# Altium PCB heart.PcbDoc (part 2 of 8)
Units mil, origin at the board's own origin, x right, y up, seen from the top; angles counter-clockwise.
Board outline 5000 x 6000 mil, 2 copper layers (Top Layer, Bottom Layer); 76 components, 43 nets, 328 pads, 50 vias.
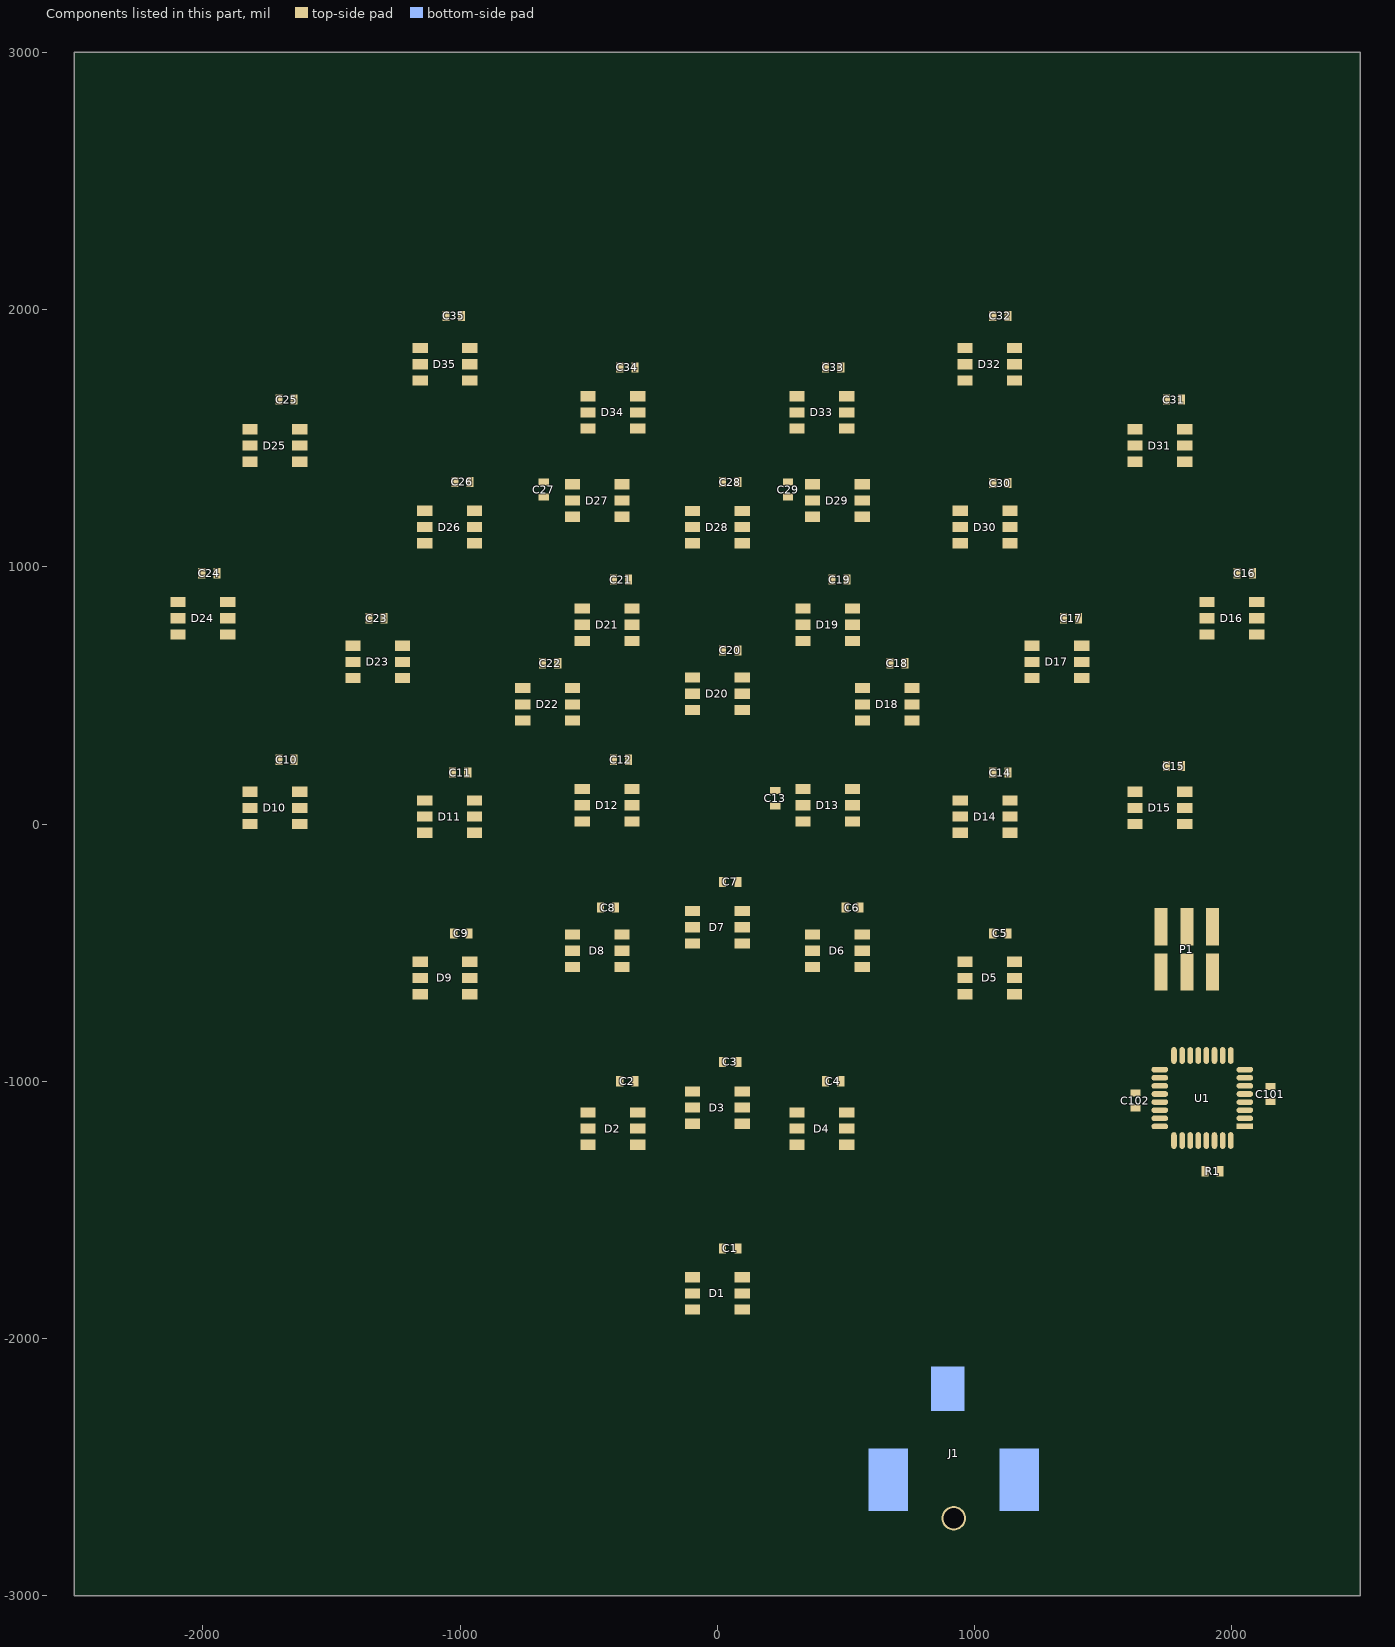
[diagram p2: the components of this part, seen from the top]

## Via types
v1: diameter 48, hole 20, Top Layer to Bottom Layer, 46 vias
v2: diameter 165, hole 150, Top Layer to Bottom Layer, 4 vias

## Nets (pads, with @x,y where several pads share a name; then routed paths per layer and width w, separated by ;. In a path a pad name is that pad's centre, name@x,y a point inside that pad or via, vN(x,y) a via of type N, cw(c..) or ccw(c..) an arc to the next point about the centre after c; other vN are vias at no path point) (continued)
copper on no net: (continued)
  Bottom Layer w2.65: -2381.33,-2287.69 -2150.35,-2287.69 ; -2381.33,-2285.04 -2153,-2285.04 ; -2381.33,-2282.38 -2158.31,-2282.38 ; -2381.33,-2279.73 -2163.62,-2279.73 ; -2381.33,-2277.07 -2166.28,-2277.07 ; -2381.33,-2274.42 -2163.62,-2274.42 ; -2381.33,-2271.76 -2145.04,-2271.76 ; -2381.33,-2269.11 -2293.72,-2269.11 ; -2381.33,-2266.45 -2296.37,-2266.45 ; -2381.33,-2263.8 -2301.68,-2263.8 ; -2381.33,-2261.14 -2301.68,-2261.14 ; -2381.33,-2258.49 -2304.34,-2258.49 ; -2381.33,-2255.83 -2306.99,-2255.83 ; -2381.33,-2253.18 -2306.99,-2253.18 ; -2381.33,-2250.52 -2306.99,-2250.52 ; -2381.33,-2247.87 -2309.65,-2247.87 ; -2381.33,-2245.21 -2309.65,-2245.21 ; -2381.33,-2242.56 -2309.65,-2242.56 ; -2381.33,-2239.9 -2309.65,-2239.9 ; -2381.33,-2237.25 -2312.3,-2237.25 ; -2381.33,-2234.59 -2314.96,-2234.59 ; -2381.33,-2231.94 -2317.61,-2231.94 ; -2381.33,-2229.28 -2322.92,-2229.28 ; -2381.33,-2226.63 -2325.58,-2226.63 ; -2381.33,-2223.97 -2325.58,-2223.97 ; -2381.33,-2221.32 -2328.23,-2221.32 ; -2381.33,-2218.66 -2330.89,-2218.66 ; -2381.33,-2216.01 -2330.89,-2216.01 ; -2381.33,-2213.35 -2333.54,-2213.35 ; -2381.33,-2210.7 -2333.54,-2210.7 ; -2381.33,-2208.04 -2336.2,-2208.04 ; -2381.33,-2205.39 -2336.2,-2205.39 ; -2381.33,-2202.73 -2336.2,-2202.73 ; -2381.33,-2200.08 -2338.85,-2200.08 ; -2381.33,-2197.42 -2338.85,-2197.42 ; -2381.33,-2194.77 -2338.85,-2194.77 ; -2381.33,-2192.11 -2338.85,-2192.11 ; -2381.33,-2189.46 -2338.85,-2189.46 ; -2381.33,-2186.8 -2338.85,-2186.8 ; -2381.33,-2184.15 -2338.85,-2184.15 ; -2381.33,-2181.49 -2338.85,-2181.49 ; -2381.33,-2178.84 -2338.85,-2178.84 ; -2381.33,-2176.18 -2338.85,-2176.18 ; -2381.33,-2173.53 -2336.2,-2173.53 ; -2381.33,-2170.87 -2336.2,-2170.87 ; -2381.33,-2168.22 -2333.54,-2168.22 ; -2381.33,-2165.56 -2333.54,-2165.56 ; -2381.33,-2162.91 -2333.54,-2162.91 ; -2381.33,-2160.25 -2330.89,-2160.25 ; -2381.33,-2157.6 -2328.23,-2157.6 ; -2381.33,-2154.94 -2325.58,-2154.94 ; -2381.33,-2152.28 -2325.58,-2152.28 ; -2381.33,-2149.63 -2322.92,-2149.63 ; -2381.33,-2146.97 -2317.61,-2146.97 ; -2381.33,-2144.32 -2314.96,-2144.32 ; -2381.33,-2141.66 -2306.99,-2141.66 ; -2381.33,-2139.01 -2299.03,-2139.01 ; -2381.33,-2136.35 -2293.72,-2136.35 ; -2381.33,-2133.7 -2293.72,-2133.7 ; -2381.33,-2131.04 -2293.72,-2131.04 ; -2381.33,-2128.39 -2293.72,-2128.39 ; -2381.33,-2125.73 -2349.47,-2125.73 ; -2381.33,-2123.08 -2354.78,-2123.08 ; -2381.33,-2120.42 -2360.09,-2120.42 ; -2381.33,-2117.77 -2365.4,-2117.77 ; -2381.33,-2115.11 -2368.06,-2115.11 ; -2381.33,-2112.46 -2368.06,-2112.46 ; -2381.33,-2109.8 -2370.71,-2109.8 ; -2381.33,-2107.15 -2373.37,-2107.15 ; -2381.33,-2104.49 -2373.37,-2104.49 ; -2381.33,-2101.84 -2373.37,-2101.84 ; -2381.33,-2099.18 -2373.37,-2099.18 ; -2381.33,-2096.53 -2373.37,-2096.53 ; -2381.33,-2093.87 -2373.37,-2093.87 ; -2381.33,-2091.22 -2373.37,-2091.22 ; -2381.33,-2088.56 -2373.37,-2088.56 ; -2381.33,-2085.91 -2373.37,-2085.91 ; -2381.33,-2083.25 -2370.71,-2083.25 ; -2381.33,-2080.6 -2370.71,-2080.6 ; -2381.33,-2077.94 -2368.06,-2077.94 ; -2381.33,-2075.29 -2370.71,-2075.29 ; -2381.33,-2072.63 -2370.71,-2072.63 ; -2381.33,-2069.98 -2373.37,-2069.98 ; -2381.33,-2067.32 -2373.37,-2067.32 ; -2381.33,-2064.67 -2376.02,-2064.67 ; -2381.33,-2062.01 -2376.02,-2062.01 ; -2381.33,-2059.36 -2378.68,-2059.36 ; -2381.33,-2056.7 -2378.68,-2056.7 ; -2381.33,-2054.05 -2378.68,-2054.05 ; -2381.33,-2051.39 -2378.68,-2051.39 ; -2381.33,-2024.84 -2378.68,-2024.84 ; -2381.33,-2022.19 -2378.68,-2022.19 ; -2381.33,-2019.53 -2378.68,-2019.53 ; -2381.33,-2016.88 -2378.68,-2016.88 ; -2381.33,-2014.22 -2376.02,-2014.22 ; -2381.33,-2011.57 -2376.02,-2011.57 ; -2381.33,-2008.91 -2376.02,-2008.91 ; -2381.33,-2006.26 -2373.37,-2006.26 ; -2381.33,-2003.6 -2373.37,-2003.6 ; -2381.33,-2000.95 -2370.71,-2000.95 ; -2381.33,-1998.29 -2368.06,-1998.29 ; -2381.33,-1995.64 -2365.4,-1995.64 ; -2381.33,-1992.98 -2362.75,-1992.98 ; -2381.33,-1990.33 -2360.09,-1990.33 ; -2381.33,-1987.67 -2357.44,-1987.67 ; -2381.33,-1985.02 -2352.13,-1985.02 ; -2381.33,-1982.36 -2346.82,-1982.36 ; -2381.33,-1979.71 -2336.2,-1979.71 ; -2381.33,-1977.05 -2293.72,-1977.05 ; -2381.33,-1974.4 -2293.72,-1974.4 ; -2381.33,-1971.74 -2293.72,-1971.74 ; -2381.33,-1969.09 -2293.72,-1969.09 ; -2381.33,-1966.43 -2293.72,-1966.43 ; -2381.33,-1963.78 -2293.72,-1963.78 ; -2381.33,-1961.12 -2293.72,-1961.12 ; -2381.33,-1958.47 -2293.72,-1958.47 ; -2381.33,-1955.81 -2296.37,-1955.81 ; -2381.33,-1953.16 -2301.68,-1953.16 ; -2381.33,-1950.5 -2301.68,-1950.5 ; -2381.33,-1947.85 -2304.34,-1947.85 ; -2381.33,-1945.19 -2304.34,-1945.19 ; -2381.33,-1942.54 -2304.34,-1942.54 ; -2381.33,-1939.88 -2304.34,-1939.88 ; -2381.33,-1937.23 -2304.34,-1937.23 ; -2381.33,-1934.57 -2304.34,-1934.57 ; -2381.33,-1931.92 -2304.34,-1931.92 ; -2381.33,-1929.26 -2304.34,-1929.26 ; -2381.33,-1926.61 -2304.34,-1926.61 ; -2381.33,-1923.95 -2304.34,-1923.95 ; -2381.33,-1921.3 -2304.34,-1921.3 ; -2381.33,-1918.64 -2304.34,-1918.64 ; -2381.33,-1915.99 -2304.34,-1915.99 ; -2381.33,-1913.33 -2293.72,-1913.33 ; -2381.33,-1910.68 -2293.72,-1910.68 ; -2381.33,-1908.02 -2293.72,-1908.02 ; -2381.33,-1905.37 -2293.72,-1905.37 ; -2381.33,-1902.71 -2293.72,-1902.71 ; -2381.33,-1900.06 -2293.72,-1900.06 ; -2381.33,-1897.4 -2293.72,-1897.4 ; -2381.33,-1894.75 -2293.72,-1894.75 ; -2381.33,-1892.09 -2293.72,-1892.09 ; -2381.33,-1889.44 -2293.72,-1889.44 ; -2381.33,-1886.78 -2293.72,-1886.78 ; -2381.33,-1884.13 -2293.72,-1884.13 ; -2381.33,-1881.47 -2293.72,-1881.47 ; -2381.33,-1878.82 -2293.72,-1878.82 ; -2381.33,-1876.16 -2293.72,-1876.16 ; -2381.33,-1873.51 -2293.72,-1873.51 ; -2381.33,-1870.85 -2293.72,-1870.85 ; -2381.33,-1868.2 -2293.72,-1868.2 ; -2381.33,-1865.54 -2293.72,-1865.54 ; -2381.33,-1862.89 -2293.72,-1862.89 ; -2381.33,-1860.23 -2293.72,-1860.23 ; -2381.33,-1857.58 -2293.72,-1857.58 ; -2381.33,-1854.92 -2293.72,-1854.92 ; -2381.33,-1852.27 -2293.72,-1852.27 ; -2381.33,-1849.61 -2293.72,-1849.61 ; -2381.33,-1846.96 -2293.72,-1846.96 ; -2381.33,-1844.3 -2293.72,-1844.3 ; -2381.33,-1841.65 -2293.72,-1841.65 ; -2381.33,-1838.99 -2293.72,-1838.99 ; -2381.33,-1836.34 -2293.72,-1836.34 ; -2381.33,-1833.68 -2293.72,-1833.68 ; -2381.33,-1831.03 -2293.72,-1831.03 ; -2381.33,-1828.37 -2293.72,-1828.37 ; -2381.33,-1825.72 -2293.72,-1825.72 ; -2381.33,-1823.06 -2293.72,-1823.06 ; -2381.33,-1820.41 -2293.72,-1820.41 ; -2381.33,-1817.75 -2293.72,-1817.75 ; -2381.33,-1815.1 -2293.72,-1815.1 ; -2381.33,-1812.44 -2293.72,-1812.44 ; -2381.33,-1809.79 -2293.72,-1809.79 ; -2381.33,-1807.13 -2293.72,-1807.13 ; -2381.33,-1804.48 -2293.72,-1804.48 ; -2381.33,-1801.82 -2293.72,-1801.82 ; -2381.33,-1799.17 -2293.72,-1799.17 ; -2381.33,-1796.51 -2293.72,-1796.51 ; -2381.33,-1793.86 -2293.72,-1793.86 ; -2381.33,-1791.2 -2293.72,-1791.2 ; -2381.33,-1788.55 -2293.72,-1788.55 ; -2381.33,-1785.89 -2293.72,-1785.89 ; -2381.33,-1783.24 -2293.72,-1783.24 ; -2381.33,-1780.58 -2293.72,-1780.58 ; -2381.33,-1777.93 -2293.72,-1777.93 ; -2381.33,-1775.27 -2293.72,-1775.27 ; -2381.33,-1772.62 -2293.72,-1772.62 ; -2381.33,-1769.96 -2293.72,-1769.96 ; -2381.33,-1767.31 -2293.72,-1767.31 ; -2381.33,-1764.65 -2293.72,-1764.65 ; -2381.33,-1762 -2293.72,-1762 ; -2381.33,-1759.34 -2293.72,-1759.34 ; -2381.33,-1756.69 -2293.72,-1756.69 ; -2381.33,-1754.03 -2304.34,-1754.03 ; -2381.33,-1751.38 -2304.34,-1751.38 ; -2381.33,-1748.72 -2304.34,-1748.72 ; -2381.33,-1746.07 -2304.34,-1746.07 ; -2381.33,-1743.41 -2304.34,-1743.41 ; -2381.33,-1740.76 -2304.34,-1740.76 ; -2381.33,-1738.1 -2304.34,-1738.1 ; -2381.33,-1735.45 -2304.34,-1735.45 ; -2381.33,-1732.79 -2304.34,-1732.79 ; -2381.33,-1730.14 -2304.34,-1730.14 ; -2381.33,-1727.48 -2304.34,-1727.48 ; -2381.33,-1724.83 -2304.34,-1724.83 ; -2381.33,-1722.17 -2304.34,-1722.17 ; -2381.33,-1719.52 -2301.68,-1719.52 ; -2381.33,-1716.86 -2301.68,-1716.86 ; -2381.33,-1714.21 -2296.37,-1714.21 ; -2381.33,-1711.55 -2293.72,-1711.55 ; -2381.33,-1708.9 -2293.72,-1708.9 ; -2381.33,-1706.24 -2293.72,-1706.24 ; -2381.33,-1703.59 -2293.72,-1703.59 ; -2381.33,-1700.93 -2293.72,-1700.93 ; -2381.33,-1698.28 -2293.72,-1698.28 ; -2381.33,-1695.62 -2293.72,-1695.62 ; -2381.33,-1692.97 -2293.72,-1692.97 ; -2381.33,-1690.31 -2338.85,-1690.31 ; -2381.33,-1687.66 -2346.82,-1687.66 ; -2381.33,-1685 -2352.13,-1685 ; -2381.33,-1682.35 -2357.44,-1682.35 ; -2381.33,-1679.69 -2360.09,-1679.69 ; -2381.33,-1677.04 -2365.4,-1677.04 ; -2381.33,-1674.38 -2365.4,-1674.38 ; -2381.33,-1671.73 -2368.06,-1671.73 ; -2381.33,-1669.07 -2370.71,-1669.07 ; -2381.33,-1666.42 -2373.37,-1666.42 ; -2381.33,-1663.76 -2373.37,-1663.76 ; -2381.33,-1661.11 -2376.02,-1661.11 ; -2381.33,-1658.45 -2376.02,-1658.45 ; -2381.33,-1655.8 -2378.68,-1655.8 ; -2381.33,-1653.14 -2378.68,-1653.14 ; -2381.33,-1650.49 -2378.68,-1650.49 ; -2381.33,-1647.83 -2378.68,-1647.83 ; -2381.33,-1645.18 -2378.68,-1645.18 ; -2381.33,-1618.62 -2378.68,-1618.62 ; -2381.33,-1615.97 -2378.68,-1615.97 ; -2381.33,-1613.31 -2378.68,-1613.31 ; -2381.33,-1610.66 -2378.68,-1610.66 ; -2381.33,-1608 -2376.02,-1608 ; -2381.33,-1605.35 -2376.02,-1605.35 ; -2381.33,-1602.69 -2373.37,-1602.69 ; -2381.33,-1600.04 -2373.37,-1600.04 ; -2381.33,-1597.38 -2370.71,-1597.38 ; -2381.33,-1594.73 -2370.71,-1594.73 ; -2381.33,-1592.07 -2368.06,-1592.07 ; -2381.33,-1589.42 -2370.71,-1589.42 ; -2381.33,-1586.76 -2370.71,-1586.76 ; -2381.33,-1584.11 -2373.37,-1584.11 ; -2381.33,-1581.45 -2373.37,-1581.45 ; -2381.33,-1578.8 -2373.37,-1578.8 ; -2381.33,-1576.14 -2373.37,-1576.14 ; -2381.33,-1573.49 -2373.37,-1573.49 ; -2381.33,-1570.83 -2373.37,-1570.83 ; -2381.33,-1568.18 -2373.37,-1568.18 ; -2381.33,-1565.52 -2373.37,-1565.52 ; -2381.33,-1562.87 -2370.71,-1562.87 ; -2381.33,-1560.21 -2370.71,-1560.21 ; -2381.33,-1557.56 -2368.06,-1557.56 ; -2381.33,-1554.9 -2368.06,-1554.9 ; -2381.33,-1552.25 -2365.4,-1552.25 ; -2381.33,-1549.59 -2360.09,-1549.59 ; -2381.33,-1546.94 -2354.78,-1546.94 ; -2381.33,-1544.28 -2346.82,-1544.28 ; -2381.33,-1541.63 -2293.72,-1541.63 ; -2381.33,-1538.97 -2293.72,-1538.97 ; -2381.33,-1536.32 -2293.72,-1536.32 ; -2381.33,-1533.66 -2293.72,-1533.66 ; -2381.33,-1531.01 -2299.03,-1531.01 ; -2381.33,-1528.35 -2309.65,-1528.35 ; -2381.33,-1525.7 -2314.96,-1525.7 ; -2381.33,-1523.04 -2317.61,-1523.04 ; -2381.33,-1520.39 -2322.92,-1520.39 ; -2381.33,-1517.73 -2325.58,-1517.73 ; -2381.33,-1515.08 -2325.58,-1515.08 ; -2381.33,-1512.42 -2328.23,-1512.42 ; -2381.33,-1509.77 -2330.89,-1509.77 ; -2381.33,-1507.11 -2333.54,-1507.11 ; -2381.33,-1504.46 -2333.54,-1504.46 ; -2381.33,-1501.8 -2336.2,-1501.8 ; -2381.33,-1499.15 -2336.2,-1499.15 ; -2381.33,-1496.49 -2336.2,-1496.49 ; -2381.33,-1493.84 -2338.85,-1493.84 ; -2381.33,-1491.18 -2338.85,-1491.18 ; -2381.33,-1488.53 -2338.85,-1488.53 ; -2381.33,-1485.87 -2338.85,-1485.87 ; -2381.33,-1483.22 -2338.85,-1483.22 ; -2381.33,-1480.56 -2338.85,-1480.56 ; -2381.33,-1477.91 -2338.85,-1477.91 ; -2381.33,-1475.25 -2338.85,-1475.25 ; -2381.33,-1472.6 -2338.85,-1472.6 ; -2381.33,-1469.94 -2338.85,-1469.94 ; -2381.33,-1467.29 -2336.2,-1467.29 ; -2381.33,-1464.63 -2336.2,-1464.63 ; -2381.33,-1461.98 -2336.2,-1461.98 ; -2381.33,-1459.32 -2333.54,-1459.32 ; -2381.33,-1456.67 -2333.54,-1456.67 ; -2381.33,-1454.01 -2330.89,-1454.01 ; -2381.33,-1451.36 -2330.89,-1451.36 ; -2381.33,-1448.7 -2328.23,-1448.7 ; -2381.33,-1446.05 -2325.58,-1446.05 ; -2381.33,-1443.39 -2322.92,-1443.39 ; -2381.33,-1440.74 -2320.27,-1440.74 ; -2381.33,-1438.08 -2317.61,-1438.08 ; -2381.33,-1435.43 -2314.96,-1435.43 ; -2381.33,-1432.77 -2309.65,-1432.77 ; -2381.33,-1430.12 -2309.65,-1430.12 ; -2381.33,-1427.46 -2309.65,-1427.46 ; -2381.33,-1424.81 -2309.65,-1424.81 ; -2381.33,-1422.15 -2309.65,-1422.15 ; -2381.33,-1419.5 -2306.99,-1419.5 ; -2381.33,-1416.84 -2306.99,-1416.84 ; -2381.33,-1414.19 -2306.99,-1414.19 ; -2381.33,-1411.53 -2304.34,-1411.53 ; -2381.33,-1408.88 -2301.68,-1408.88 ; -2381.33,-1406.22 -2301.68,-1406.22 ; -2381.33,-1403.57 -2296.37,-1403.57 ; -2381.33,-1400.91 -2293.72,-1400.91 ; -2381.33,-1398.26 -2293.72,-1398.26 ; -2381.33,-1395.6 -2293.72,-1395.6 ; -2381.33,-1392.95 -2293.72,-1392.95 ; -2381.33,-1390.29 -2293.72,-1390.29 ; -2381.33,-1387.64 -2293.72,-1387.64 ; -2381.33,-1384.98 -2293.72,-1384.98 ; -2381.33,-1382.33 -2293.72,-1382.33 ; -2381.33,-1379.67 -2293.72,-1379.67 ; -2381.33,-1377.02 -2293.72,-1377.02 ; -2381.33,-1374.36 -2293.72,-1374.36 ; -2381.33,-1371.71 -2293.72,-1371.71 ; -2381.33,-1369.05 -2293.72,-1369.05 ; -2381.33,-1366.4 -2293.72,-1366.4 ; -2381.33,-1363.74 -2293.72,-1363.74 ; -2381.33,-1361.09 -2293.72,-1361.09 ; -2381.33,-1358.43 -2293.72,-1358.43 ; -2381.33,-1355.78 -2293.72,-1355.78 ; -2381.33,-1353.12 -2293.72,-1353.12 ; -2381.33,-1350.47 -2293.72,-1350.47 ; -2381.33,-1347.81 -2293.72,-1347.81 ; -2381.33,-1345.16 -2293.72,-1345.16 ; -2381.33,-1342.5 -2293.72,-1342.5 ; -2381.33,-1339.85 -2293.72,-1339.85 ; -2381.33,-1337.19 -2293.72,-1337.19 ; -2381.33,-1334.54 -2293.72,-1334.54 ; -2381.33,-1331.88 -2293.72,-1331.88 ; -2381.33,-1329.23 -2293.72,-1329.23 ; -2381.33,-1326.57 -2291.06,-1326.57 ; -2381.33,-1323.92 -2291.06,-1323.92 ; -2381.33,-1321.26 -2291.06,-1321.26 ; -2381.33,-1318.61 -2291.06,-1318.61 ; -2381.33,-1315.95 -2293.72,-1315.95 ; -2381.33,-1313.3 -2293.72,-1313.3 ; -2381.33,-1310.64 -2296.37,-1310.64 ; -2381.33,-1307.99 -2296.37,-1307.99 ; -2381.33,-1305.33 -2299.03,-1305.33 ; -2381.33,-1302.68 -2299.03,-1302.68 ; -2381.33,-1300.02 -2299.03,-1300.02 ; -2381.33,-1297.37 -2299.03,-1297.37 ; -2381.33,-1294.71 -2301.68,-1294.71 ; -2381.33,-1292.06 -2301.68,-1292.06 ; -2381.33,-1289.4 -2301.68,-1289.4 ; -2381.33,-1286.75 -2301.68,-1286.75 ; -2381.33,-1284.09 -2301.68,-1284.09 ; -2381.33,-1281.44 -2301.68,-1281.44 ; -2381.33,-1278.78 -2301.68,-1278.78 ; -2381.33,-1276.13 -2301.68,-1276.13 ; -2381.33,-1273.47 -2301.68,-1273.47 ; -2381.33,-1270.82 -2301.68,-1270.82 ; -2381.33,-1268.16 -2301.68,-1268.16 ; -2381.33,-1265.51 -2301.68,-1265.51 ; -2381.33,-1262.85 -2299.03,-1262.85 ; -2381.33,-1260.2 -2299.03,-1260.2 ; -2381.33,-1257.54 -2299.03,-1257.54 ; -2381.33,-1254.89 -2299.03,-1254.89 ; -2381.33,-1252.23 -2296.37,-1252.23 ; -2381.33,-1249.58 -2296.37,-1249.58 ; -2381.33,-1246.92 -2293.72,-1246.92 ; -2381.33,-1244.27 -2293.72,-1244.27 ; -2381.33,-1241.61 -2291.06,-1241.61 ; -2381.33,-1238.96 -2288.41,-1238.96 ; -2381.33,-1236.3 -2288.41,-1236.3 ; -2381.33,-1233.65 -2288.41,-1233.65 ; -2381.33,-1230.99 -2288.41,-1230.99 ; -2381.33,-1228.34 -2288.41,-1228.34 ; -2381.33,-1225.68 -2288.41,-1225.68 ; -2381.33,-1223.03 -2288.41,-1223.03 ; -2381.33,-1220.37 -2288.41,-1220.37 ; -2381.33,-1217.72 -2288.41,-1217.72 ; -2381.33,-1215.06 -2306.99,-1215.06 ; -2381.33,-1212.41 -2309.65,-1212.41 ; -2381.33,-1209.75 -2306.99,-1209.75 ; -2381.33,-1207.1 -2301.68,-1207.1 ; -2381.33,-1204.44 -2296.37,-1204.44 ; -2381.33,-1201.79 -2293.72,-1201.79 ; -2370.71,-2054.05 -2354.78,-2054.05 ; -2370.71,-2051.39 -2357.44,-2051.39 ; -2370.71,-2048.74 -2357.44,-2048.74 ; -2370.71,-2046.08 -2357.44,-2046.08 ; -2370.71,-2043.43 -2357.44,-2043.43 ; -2370.71,-2040.77 -2357.44,-2040.77 ; -2370.71,-2038.12 -2357.44,-2038.12 ; -2370.71,-2035.46 -2357.44,-2035.46 ; -2370.71,-2032.81 -2357.44,-2032.81 ; -2370.71,-2030.15 -2357.44,-2030.15 ; -2370.71,-2027.5 -2357.44,-2027.5 ; -2370.71,-2024.84 -2357.44,-2024.84 ; -2370.71,-2022.19 -2357.44,-2022.19 ; -2370.71,-1647.83 -2357.44,-1647.83 ; -2370.71,-1645.18 -2357.44,-1645.18 ; -2370.71,-1642.52 -2357.44,-1642.52 ; -2370.71,-1639.86 -2357.44,-1639.86 ; -2370.71,-1637.21 -2357.44,-1637.21 ; -2370.71,-1634.55 -2357.44,-1634.55 ; -2370.71,-1631.9 -2357.44,-1631.9 ; -2370.71,-1629.24 -2357.44,-1629.24 ; -2370.71,-1626.59 -2357.44,-1626.59 ; -2370.71,-1623.93 -2357.44,-1623.93 ; -2370.71,-1621.28 -2357.44,-1621.28 ; -2370.71,-1618.62 -2357.44,-1618.62 ; -2370.71,-1615.97 -2354.78,-1615.97 ; -2368.06,-2059.36 -2352.13,-2059.36 ; -2368.06,-2056.7 -2354.78,-2056.7 ; -2368.06,-2019.53 -2354.78,-2019.53 ; -2368.06,-2016.88 -2354.78,-2016.88 ; -2368.06,-2014.22 -2352.13,-2014.22 ; -2368.06,-1655.8 -2352.13,-1655.8 ; -2368.06,-1653.14 -2354.78,-1653.14 ; -2368.06,-1650.49 -2354.78,-1650.49 ; -2368.06,-1613.31 -2354.78,-1613.31 ; -2368.06,-1610.66 -2352.13,-1610.66 ; -2365.4,-2101.84 -2354.78,-2101.84 ; -2365.4,-2099.18 -2354.78,-2099.18 ; -2365.4,-2096.53 -2352.13,-2096.53 ; -2365.4,-2093.87 -2349.47,-2093.87 ; -2365.4,-2091.22 -2346.82,-2091.22 ; -2365.4,-2067.32 -2346.82,-2067.32 ; -2365.4,-2064.67 -2349.47,-2064.67 ; -2365.4,-2062.01 -2352.13,-2062.01 ; -2365.4,-2011.57 -2349.47,-2011.57 ; -2365.4,-2008.91 -2349.47,-2008.91 ; -2365.4,-1661.11 -2349.47,-1661.11 ; -2365.4,-1658.45 -2352.13,-1658.45 ; -2365.4,-1608 -2352.13,-1608 ; -2365.4,-1605.35 -2349.47,-1605.35 ; -2365.4,-1602.69 -2346.82,-1602.69 ; -2365.4,-1578.8 -2346.82,-1578.8 ; -2365.4,-1576.14 -2352.13,-1576.14 ; -2365.4,-1573.49 -2354.78,-1573.49 ; -2365.4,-1570.83 -2354.78,-1570.83 ; -2365.4,-1568.18 -2354.78,-1568.18 ; -2362.75,-2107.15 -2354.78,-2107.15 ; -2362.75,-2104.49 -2354.78,-2104.49 ; -2362.75,-2088.56 -2272.48,-2088.56 ; -2362.75,-2085.91 -2269.82,-2085.91 ; -2362.75,-2083.25 -2325.58,-2083.25 ; -2362.75,-2069.98 -2346.82,-2069.98 ; -2362.75,-2006.26 -2344.16,-2006.26 ; -2362.75,-1663.76 -2346.82,-1663.76 ; -2362.75,-1600.04 -2346.82,-1600.04 ; -2362.75,-1586.76 -2322.92,-1586.76 ; -2362.75,-1584.11 -2269.82,-1584.11 ; -2362.75,-1581.45 -2275.13,-1581.45 ; -2362.75,-1565.52 -2354.78,-1565.52 ; -2362.75,-1562.87 -2354.78,-1562.87 ; -2360.09,-2109.8 -2352.13,-2109.8 ; -2360.09,-2080.6 -2330.89,-2080.6 ; -2360.09,-2077.94 -2336.2,-2077.94 ; -2360.09,-2075.29 -2338.85,-2075.29 ; -2360.09,-2072.63 -2344.16,-2072.63 ; -2360.09,-2003.6 -2341.51,-2003.6 ; -2360.09,-2000.95 -2306.99,-2000.95 ; -2360.09,-1669.07 -2333.54,-1669.07 ; -2360.09,-1666.42 -2341.51,-1666.42 ; -2360.09,-1597.38 -2341.51,-1597.38 ; -2360.09,-1594.73 -2338.85,-1594.73 ; -2360.09,-1592.07 -2336.2,-1592.07 ; -2360.09,-1589.42 -2330.89,-1589.42 ; -2360.09,-1560.21 -2352.13,-1560.21 ; -2357.44,-2112.46 -2352.13,-2112.46 ; -2357.44,-1671.73 -2309.65,-1671.73 ; -2357.44,-1557.56 -2349.47,-1557.56 ; -2354.78,-1998.29 -2309.65,-1998.29 ; -2352.13,-2115.11 -2349.47,-2115.11 ; -2352.13,-1995.64 -2312.3,-1995.64 ; -2352.13,-1674.38 -2312.3,-1674.38 ; -2352.13,-1554.9 -2349.47,-1554.9 ; -2349.47,-2046.08 -2328.23,-2046.08 ; -2349.47,-2043.43 -2328.23,-2043.43 ; -2349.47,-2040.77 -2325.58,-2040.77 ; -2349.47,-2038.12 -2325.58,-2038.12 ; -2349.47,-2035.46 -2322.92,-2035.46 ; -2349.47,-2032.81 -2320.27,-2032.81 ; -2349.47,-2030.15 -2320.27,-2030.15 ; -2349.47,-2027.5 -2317.61,-2027.5 ; -2349.47,-1992.98 -2317.61,-1992.98 ; -2349.47,-1677.04 -2317.61,-1677.04 ; -2349.47,-1642.52 -2317.61,-1642.52 ; -2349.47,-1639.86 -2320.27,-1639.86 ; -2349.47,-1637.21 -2320.27,-1637.21 ; -2349.47,-1634.55 -2322.92,-1634.55 ; -2349.47,-1631.9 -2325.58,-1631.9 ; -2349.47,-1629.24 -2325.58,-1629.24 ; -2349.47,-1626.59 -2328.23,-1626.59 ; -2349.47,-1623.93 -2328.23,-1623.93 ; -2346.82,-2101.84 -2338.85,-2101.84 ; -2346.82,-2054.05 -2293.72,-2054.05 ; -2346.82,-2051.39 -2325.58,-2051.39 ; -2346.82,-2048.74 -2328.23,-2048.74 ; -2346.82,-2024.84 -2317.61,-2024.84 ; -2346.82,-2022.19 -2317.61,-2022.19 ; -2346.82,-1647.83 -2317.61,-1647.83 ; -2346.82,-1645.18 -2317.61,-1645.18 ; -2346.82,-1621.28 -2328.23,-1621.28 ; -2346.82,-1618.62 -2325.58,-1618.62 ; -2346.82,-1615.97 -2293.72,-1615.97 ; -2346.82,-1568.18 -2338.85,-1568.18 ; -2344.16,-2107.15 -2317.61,-2107.15 ; -2344.16,-2104.49 -2330.89,-2104.49 ; -2344.16,-2056.7 -2293.72,-2056.7 ; -2344.16,-2019.53 -2317.61,-2019.53 ; -2344.16,-2016.88 -2320.27,-2016.88 ; -2344.16,-1653.14 -2320.27,-1653.14 ; -2344.16,-1650.49 -2317.61,-1650.49 ; -2344.16,-1613.31 -2293.72,-1613.31 ; -2344.16,-1565.52 -2330.89,-1565.52 ; -2344.16,-1562.87 -2317.61,-1562.87 ; -2341.51,-2109.8 -2293.72,-2109.8 ; -2341.51,-2062.01 -2293.72,-2062.01 ; -2341.51,-2059.36 -2293.72,-2059.36 ; -2341.51,-2014.22 -2322.92,-2014.22 ; -2341.51,-1990.33 -2322.92,-1990.33 ; -2341.51,-1679.69 -2322.92,-1679.69 ; -2341.51,-1655.8 -2322.92,-1655.8 ; -2341.51,-1610.66 -2293.72,-1610.66 ; -2341.51,-1608 -2293.72,-1608 ; -2341.51,-1560.21 -2293.72,-1560.21 ; -2338.85,-2091.22 -2277.79,-2091.22 ; -2338.85,-2064.67 -2293.72,-2064.67 ; -2338.85,-1605.35 -2293.72,-1605.35 ; -2338.85,-1578.8 -2277.79,-1578.8 ; -2336.2,-2112.46 -2293.72,-2112.46 ; -2336.2,-2067.32 -2293.72,-2067.32 ; -2336.2,-2011.57 -2325.58,-2011.57 ; -2336.2,-1658.45 -2325.58,-1658.45 ; -2336.2,-1602.69 -2293.72,-1602.69 ; -2336.2,-1557.56 -2293.72,-1557.56 ; -2333.54,-2115.11 -2293.72,-2115.11 ; -2333.54,-2093.87 -2283.1,-2093.87 ; -2333.54,-1576.14 -2285.75,-1576.14 ; -2333.54,-1554.9 -2293.72,-1554.9 ; -2330.89,-2194.77 -2317.61,-2194.77 ; -2330.89,-2192.11 -2317.61,-2192.11 ; -2330.89,-2189.46 -2317.61,-2189.46 ; -2330.89,-2186.8 -2317.61,-2186.8 ; -2330.89,-2184.15 -2317.61,-2184.15 ; -2330.89,-2181.49 -2317.61,-2181.49 ; -2330.89,-2069.98 -2293.72,-2069.98 ; -2330.89,-1669.07 -2306.99,-1669.07 ; -2330.89,-1600.04 -2293.72,-1600.04 ; -2330.89,-1488.53 -2317.61,-1488.53 ; -2330.89,-1485.87 -2317.61,-1485.87 ; -2330.89,-1483.22 -2317.61,-1483.22 ; -2330.89,-1480.56 -2317.61,-1480.56 ; -2330.89,-1477.91 -2317.61,-1477.91 ; -2330.89,-1475.25 -2314.96,-1475.25 ; -2328.23,-2205.39 -2312.3,-2205.39 ; -2328.23,-2202.73 -2314.96,-2202.73 ; -2328.23,-2200.08 -2314.96,-2200.08 ; -2328.23,-2197.42 -2314.96,-2197.42 ; -2328.23,-2178.84 -2314.96,-2178.84 ; -2328.23,-2176.18 -2314.96,-2176.18 ; -2328.23,-2173.53 -2312.3,-2173.53 ; -2328.23,-2117.77 -2293.72,-2117.77 ; -2328.23,-2072.63 -2293.72,-2072.63 ; -2328.23,-1979.71 -2293.72,-1979.71 ; -2328.23,-1552.25 -2293.72,-1552.25 ; -2328.23,-1496.49 -2314.96,-1496.49 ; -2328.23,-1493.84 -2314.96,-1493.84 ; -2328.23,-1491.18 -2314.96,-1491.18 ; -2328.23,-1472.6 -2314.96,-1472.6 ; -2328.23,-1469.94 -2314.96,-1469.94 ; -2328.23,-1467.29 -2312.3,-1467.29 ; -2328.23,-1464.63 -2312.3,-1464.63 ; -2325.58,-2210.7 -2309.65,-2210.7 ; -2325.58,-2208.04 -2309.65,-2208.04 ; -2325.58,-2170.87 -2312.3,-2170.87 ; -2325.58,-2168.22 -2309.65,-2168.22 ; -2325.58,-2125.73 -2293.72,-2125.73 ; -2325.58,-2123.08 -2293.72,-2123.08 ; -2325.58,-2120.42 -2293.72,-2120.42 ; -2325.58,-2096.53 -2293.72,-2096.53 ; -2325.58,-1690.31 -2293.72,-1690.31 ; -2325.58,-1597.38 -2293.72,-1597.38 ; -2325.58,-1573.49 -2293.72,-1573.49 ; -2325.58,-1549.59 -2293.72,-1549.59 ; -2325.58,-1546.94 -2293.72,-1546.94 ; -2325.58,-1544.28 -2293.72,-1544.28 ; -2325.58,-1501.8 -2309.65,-1501.8 ; -2325.58,-1499.15 -2312.3,-1499.15 ; -2325.58,-1461.98 -2309.65,-1461.98 ; -2325.58,-1459.32 -2306.99,-1459.32 ; -2322.92,-2213.35 -2306.99,-2213.35 ; -2322.92,-2165.56 -2309.65,-2165.56 ; -2322.92,-1504.46 -2309.65,-1504.46 ; -2322.92,-1456.67 -2304.34,-1456.67 ; -2320.27,-2218.66 -2299.03,-2218.66 ; -2320.27,-2216.01 -2301.68,-2216.01 ; -2320.27,-2162.91 -2306.99,-2162.91 ; -2320.27,-2160.25 -2304.34,-2160.25 ; -2320.27,-2075.29 -2299.03,-2075.29 ; -2320.27,-2003.6 -2306.99,-2003.6 ; -2320.27,-1666.42 -2304.34,-1666.42 ; -2320.27,-1509.77 -2304.34,-1509.77 ; -2320.27,-1507.11 -2306.99,-1507.11 ; -2320.27,-1454.01 -2301.68,-1454.01 ; -2317.61,-2221.32 -2288.41,-2221.32 ; -2317.61,-2157.6 -2299.03,-2157.6 ; -2317.61,-2006.26 -2304.34,-2006.26 ; -2317.61,-1982.36 -2293.72,-1982.36 ; -2317.61,-1687.66 -2293.72,-1687.66 ; -2317.61,-1663.76 -2304.34,-1663.76 ; -2317.61,-1594.73 -2299.03,-1594.73 ; -2317.61,-1512.42 -2301.68,-1512.42 ; -2317.61,-1451.36 -2296.37,-1451.36 ; -2317.61,-1448.7 -2288.41,-1448.7 ; -2314.96,-2223.97 -2253.89,-2223.97 ; -2314.96,-2051.39 -2293.72,-2051.39 ; -2314.96,-2040.77 -2312.3,-2040.77 ; -2314.96,-2008.91 -2304.34,-2008.91 ; -2314.96,-1661.11 -2304.34,-1661.11 ; -2314.96,-1618.62 -2293.72,-1618.62 ; -2314.96,-1515.08 -2296.37,-1515.08 ; -2312.3,-2154.94 -2296.37,-2154.94 ; -2312.3,-2038.12 -2309.65,-2038.12 ; -2312.3,-2035.46 -2306.99,-2035.46 ; -2312.3,-2014.22 -2301.68,-2014.22 ; -2312.3,-2011.57 -2301.68,-2011.57 ; -2312.3,-1985.02 -2293.72,-1985.02 ; -2312.3,-1685 -2293.72,-1685 ; -2312.3,-1658.45 -2301.68,-1658.45 ; -2312.3,-1655.8 -2301.68,-1655.8 ; -2312.3,-1634.55 -2306.99,-1634.55 ; -2312.3,-1631.9 -2309.65,-1631.9 ; -2312.3,-1446.05 -2253.89,-1446.05 ; -2309.65,-2226.63 -2256.55,-2226.63 ; -2309.65,-2152.28 -2291.06,-2152.28 ; -2309.65,-2032.81 -2306.99,-2032.81 ; -2309.65,-2030.15 -2304.34,-2030.15 ; -2309.65,-2027.5 -2301.68,-2027.5 ; -2309.65,-2024.84 -2301.68,-2024.84 ; -2309.65,-2022.19 -2301.68,-2022.19 ; -2309.65,-2019.53 -2301.68,-2019.53 ; -2309.65,-2016.88 -2301.68,-2016.88 ; -2309.65,-1653.14 -2301.68,-1653.14 ; -2309.65,-1650.49 -2301.68,-1650.49 ; -2309.65,-1647.83 -2301.68,-1647.83 ; -2309.65,-1645.18 -2301.68,-1645.18 ; -2309.65,-1642.52 -2304.34,-1642.52 ; -2309.65,-1639.86 -2304.34,-1639.86 ; -2309.65,-1637.21 -2306.99,-1637.21 ; -2309.65,-1621.28 -2293.72,-1621.28 ; -2309.65,-1517.73 -2291.06,-1517.73 ; -2309.65,-1443.39 -2259.2,-1443.39 ; -2306.99,-2229.28 -2261.86,-2229.28 ; -2306.99,-2197.42 -2288.41,-2197.42 ; -2306.99,-2194.77 -2288.41,-2194.77 ; -2306.99,-2192.11 -2288.41,-2192.11 ; -2306.99,-2189.46 -2291.06,-2189.46 ; -2306.99,-2186.8 -2291.06,-2186.8 ; -2306.99,-2184.15 -2293.72,-2184.15 ; -2306.99,-2181.49 -2293.72,-2181.49 ; -2306.99,-2178.84 -2293.72,-2178.84 ; -2306.99,-2048.74 -2293.72,-2048.74 ; -2306.99,-1987.67 -2293.72,-1987.67 ; -2306.99,-1682.35 -2293.72,-1682.35 ; -2306.99,-1491.18 -2293.72,-1491.18 ; -2306.99,-1488.53 -2293.72,-1488.53 ; -2306.99,-1485.87 -2293.72,-1485.87 ; -2306.99,-1483.22 -2293.72,-1483.22 ; -2306.99,-1480.56 -2293.72,-1480.56 ; -2306.99,-1477.91 -2293.72,-1477.91 ; -2306.99,-1475.25 -2293.72,-1475.25 ; -2306.99,-1472.6 -2293.72,-1472.6 ; -2306.99,-1440.74 -2261.86,-1440.74 ; -2304.34,-2202.73 -2285.75,-2202.73 ; -2304.34,-2200.08 -2285.75,-2200.08 ; -2304.34,-2176.18 -2293.72,-2176.18 ; -2304.34,-2149.63 -2288.41,-2149.63 ; -2304.34,-2046.08 -2293.72,-2046.08 ; -2304.34,-1990.33 -2293.72,-1990.33 ; -2304.34,-1679.69 -2293.72,-1679.69 ; -2304.34,-1623.93 -2293.72,-1623.93 ; -2304.34,-1520.39 -2288.41,-1520.39 ; -2304.34,-1496.49 -2293.72,-1496.49 ; -2304.34,-1493.84 -2293.72,-1493.84 ; -2304.34,-1469.94 -2293.72,-1469.94 ; -2304.34,-1467.29 -2293.72,-1467.29 ; -2301.68,-2239.9 -2285.75,-2239.9 ; -2301.68,-2237.25 -2285.75,-2237.25 ; -2301.68,-2234.59 -2280.44,-2234.59 ; -2301.68,-2231.94 -2267.17,-2231.94 ; -2301.68,-2205.39 -2283.1,-2205.39 ; -2301.68,-2173.53 -2293.72,-2173.53 ; -2301.68,-2170.87 -2293.72,-2170.87 ; -2301.68,-2043.43 -2293.72,-2043.43 ; -2301.68,-1992.98 -2293.72,-1992.98 ; -2301.68,-1915.99 -2293.72,-1915.99 ; -2301.68,-1677.04 -2293.72,-1677.04 ; -2301.68,-1626.59 -2293.72,-1626.59 ; -2301.68,-1499.15 -2293.72,-1499.15 ; -2301.68,-1464.63 -2293.72,-1464.63 ; -2301.68,-1438.08 -2267.17,-1438.08 ; -2301.68,-1435.43 -2280.44,-1435.43 ; -2301.68,-1432.77 -2285.75,-1432.77 ; -2301.68,-1430.12 -2285.75,-1430.12 ; -2299.03,-2250.52 -2288.41,-2250.52 ; -2299.03,-2247.87 -2288.41,-2247.87 ; -2299.03,-2245.21 -2288.41,-2245.21 ; -2299.03,-2242.56 -2288.41,-2242.56 ; -2299.03,-2208.04 -2283.1,-2208.04 ; -2299.03,-2168.22 -2293.72,-2168.22 ; -2299.03,-2040.77 -2293.72,-2040.77 ; -2299.03,-2038.12 -2293.72,-2038.12 ; -2299.03,-1998.29 -2293.72,-1998.29 ; -2299.03,-1995.64 -2293.72,-1995.64 ; -2299.03,-1921.3 -2293.72,-1921.3 ; -2299.03,-1918.64 -2293.72,-1918.64 ; -2299.03,-1754.03 -2293.72,-1754.03 ; -2299.03,-1751.38 -2293.72,-1751.38 ; -2299.03,-1748.72 -2293.72,-1748.72 ; -2299.03,-1674.38 -2293.72,-1674.38 ; -2299.03,-1671.73 -2293.72,-1671.73 ; -2299.03,-1631.9 -2293.72,-1631.9 ; -2299.03,-1629.24 -2293.72,-1629.24 ; -2299.03,-1562.87 -2293.72,-1562.87 ; -2299.03,-1501.8 -2293.72,-1501.8 ; -2299.03,-1427.46 -2288.41,-1427.46 ; -2299.03,-1424.81 -2288.41,-1424.81 ; -2299.03,-1422.15 -2288.41,-1422.15 ; -2299.03,-1419.5 -2288.41,-1419.5 ; -2296.37,-2255.83 -2288.41,-2255.83 ; -2296.37,-2253.18 -2288.41,-2253.18 ; -2296.37,-2165.56 -2293.72,-2165.56 ; -2296.37,-2107.15 -2293.72,-2107.15 ; -2296.37,-2035.46 -2293.72,-2035.46 ; -2296.37,-2032.81 -2293.72,-2032.81 ; -2296.37,-2003.6 -2293.72,-2003.6 ; -2296.37,-2000.95 -2293.72,-2000.95 ; -2296.37,-1926.61 -2293.72,-1926.61 ; -2296.37,-1923.95 -2293.72,-1923.95 ; -2296.37,-1746.07 -2293.72,-1746.07 ; -2296.37,-1743.41 -2293.72,-1743.41 ; -2296.37,-1669.07 -2293.72,-1669.07 ; -2296.37,-1666.42 -2293.72,-1666.42 ; -2296.37,-1637.21 -2293.72,-1637.21 ; -2296.37,-1634.55 -2293.72,-1634.55 ; -2296.37,-1504.46 -2293.72,-1504.46 ; -2296.37,-1461.98 -2293.72,-1461.98 ; -2296.37,-1416.84 -2288.41,-1416.84 ; -2296.37,-1414.19 -2288.41,-1414.19 ; -2293.72,-2258.49 -2285.75,-2258.49 ; -2293.72,-2210.7 -2280.44,-2210.7 ; -2293.72,-2083.25 -2267.17,-2083.25 ; -2293.72,-1947.85 -2256.55,-1947.85 ; -2293.72,-1722.17 -2256.55,-1722.17 ; -2293.72,-1586.76 -2267.17,-1586.76 ; -2293.72,-1411.53 -2285.75,-1411.53 ; -2293.72,-1289.4 -2280.44,-1289.4 ; -2293.72,-1286.75 -2280.44,-1286.75 ; -2293.72,-1284.09 -2280.44,-1284.09 ; -2293.72,-1281.44 -2280.44,-1281.44 ; -2293.72,-1278.78 -2280.44,-1278.78 ; -2293.72,-1276.13 -2280.44,-1276.13 ; -2293.72,-1273.47 -2280.44,-1273.47 ; -2293.72,-1270.82 -2280.44,-1270.82 ; -2291.06,-1300.02 -2277.79,-1300.02 ; -2291.06,-1297.37 -2277.79,-1297.37 ; -2291.06,-1294.71 -2277.79,-1294.71 ; -2291.06,-1292.06 -2277.79,-1292.06 ; -2291.06,-1268.16 -2277.79,-1268.16 ; -2291.06,-1265.51 -2277.79,-1265.51 ; -2291.06,-1262.85 -2277.79,-1262.85 ; -2291.06,-1260.2 -2275.13,-1260.2 ; -2288.41,-2261.14 -2283.1,-2261.14 ; -2288.41,-1950.5 -2253.89,-1950.5 ; -2288.41,-1719.52 -2253.89,-1719.52 ; -2288.41,-1589.42 -2264.51,-1589.42 ; -2288.41,-1408.88 -2283.1,-1408.88 ; -2288.41,-1307.99 -2272.48,-1307.99 ; -2288.41,-1305.33 -2275.13,-1305.33 ; -2288.41,-1302.68 -2275.13,-1302.68 ; -2288.41,-1257.54 -2275.13,-1257.54 ; -2288.41,-1254.89 -2272.48,-1254.89 ; -2285.75,-2080.6 -2264.51,-2080.6 ; -2285.75,-1313.3 -2269.82,-1313.3 ; -2285.75,-1310.64 -2269.82,-1310.64 ; -2285.75,-1252.23 -2272.48,-1252.23 ; -2285.75,-1249.58 -2269.82,-1249.58 ; -2283.1,-1945.19 -2256.55,-1945.19 ; -2283.1,-1724.83 -2256.55,-1724.83 ; -2283.1,-1592.07 -2261.86,-1592.07 ; -2283.1,-1318.61 -2264.51,-1318.61 ; -2283.1,-1315.95 -2267.17,-1315.95 ; -2283.1,-1246.92 -2267.17,-1246.92 ; -2283.1,-1244.27 -2264.51,-1244.27 ; -2280.44,-2250.52 -2264.51,-2250.52 ; -2280.44,-2247.87 -2147.69,-2247.87 ; -2280.44,-2077.94 -2261.86,-2077.94 ; -2280.44,-1942.54 -2256.55,-1942.54 ; -2280.44,-1727.48 -2256.55,-1727.48 ; -2280.44,-1448.7 -2251.24,-1448.7 ; -2280.44,-1321.26 -2261.86,-1321.26 ; -2280.44,-1241.61 -2261.86,-1241.61 ; -2280.44,-1215.06 -2272.48,-1215.06 ; -2280.44,-1212.41 -2275.13,-1212.41 ; -2277.79,-2245.21 -2147.69,-2245.21 ; -2277.79,-2221.32 -2251.24,-2221.32 ; -2277.79,-2075.29 -2259.2,-2075.29 ; -2277.79,-1730.14 -2256.55,-1730.14 ; -2277.79,-1594.73 -2259.2,-1594.73 ; -2277.79,-1323.92 -2259.2,-1323.92 ; -2277.79,-1238.96 -2259.2,-1238.96 ; -2277.79,-1230.99 -2243.27,-1230.99 ; -2277.79,-1228.34 -2232.65,-1228.34 ; -2277.79,-1225.68 -2203.45,-1225.68 ; -2277.79,-1223.03 -2264.51,-1223.03 ; -2277.79,-1220.37 -2267.17,-1220.37 ; -2277.79,-1217.72 -2269.82,-1217.72 ; -2277.79,-1201.79 -1829.09,-1201.79 ; -2275.13,-2072.63 -2256.55,-2072.63 ; -2275.13,-1939.88 -2256.55,-1939.88 ; -2275.13,-1597.38 -2256.55,-1597.38 ; -2275.13,-1326.57 -2256.55,-1326.57 ; -2275.13,-1236.3 -2253.89,-1236.3 ; -2272.48,-2269.11 -2145.04,-2269.11 ; -2272.48,-2242.56 -2150.35,-2242.56 ; -2272.48,-2069.98 -2253.89,-2069.98 ; -2272.48,-1937.23 -2256.55,-1937.23 ; -2272.48,-1732.79 -2256.55,-1732.79 ; -2272.48,-1600.04 -2253.89,-1600.04 ; -2272.48,-1329.23 -2251.24,-1329.23 ; -2272.48,-1233.65 -2248.58,-1233.65 ; -2272.48,-1204.44 -1834.4,-1204.44 ; -2269.82,-2218.66 -2248.58,-2218.66 ; -2269.82,-2067.32 -2251.24,-2067.32 ; -2269.82,-1934.57 -2256.55,-1934.57 ; -2269.82,-1931.92 -2256.55,-1931.92 ; -2269.82,-1929.26 -2256.55,-1929.26 ; -2269.82,-1926.61 -2256.55,-1926.61 ; -2269.82,-1923.95 -2256.55,-1923.95 ; -2269.82,-1921.3 -2256.55,-1921.3 ; -2269.82,-1918.64 -2256.55,-1918.64 ; -2269.82,-1915.99 -2256.55,-1915.99 ; -2269.82,-1756.69 -2256.55,-1756.69 ; -2269.82,-1754.03 -2256.55,-1754.03 ; -2269.82,-1751.38 -2256.55,-1751.38 ; -2269.82,-1748.72 -2256.55,-1748.72 ; -2269.82,-1746.07 -2256.55,-1746.07 ; -2269.82,-1743.41 -2256.55,-1743.41 ; -2269.82,-1740.76 -2256.55,-1740.76 ; -2269.82,-1738.1 -2256.55,-1738.1 ; -2269.82,-1735.45 -2256.55,-1735.45 ; -2269.82,-1602.69 -2251.24,-1602.69 ; -2269.82,-1451.36 -2248.58,-1451.36 ; -2269.82,-1331.88 -2245.93,-1331.88 ; -2269.82,-1292.06 -2264.51,-1292.06 ; -2269.82,-1289.4 -2259.2,-1289.4 ; -2269.82,-1286.75 -2253.89,-1286.75 ; -2269.82,-1284.09 -2150.35,-1284.09 ; -2269.82,-1281.44 -2150.35,-1281.44 ; -2269.82,-1278.78 -2147.69,-1278.78 ; -2269.82,-1276.13 -2147.69,-1276.13 ; -2269.82,-1273.47 -2147.69,-1273.47 ; -2269.82,-1270.82 -2145.04,-1270.82 ; -2269.82,-1268.16 -2145.04,-1268.16 ; -2267.17,-2266.45 -2145.04,-2266.45 ; -2267.17,-2064.67 -2235.31,-2064.67 ; -2267.17,-1961.12 -2253.89,-1961.12 ; -2267.17,-1958.47 -2253.89,-1958.47 ; -2267.17,-1955.81 -2253.89,-1955.81 ; -2267.17,-1953.16 -2253.89,-1953.16 ; -2267.17,-1913.33 -2256.55,-1913.33 ; -2267.17,-1910.68 -2222.03,-1910.68 ; -2267.17,-1908.02 -2232.65,-1908.02 ; -2267.17,-1905.37 -2237.96,-1905.37 ; -2267.17,-1902.71 -2240.62,-1902.71 ; -2267.17,-1767.31 -2240.62,-1767.31 ; -2267.17,-1764.65 -2237.96,-1764.65 ; -2267.17,-1762 -2232.65,-1762 ; -2267.17,-1759.34 -2253.89,-1759.34 ; -2267.17,-1716.86 -2253.89,-1716.86 ; -2267.17,-1714.21 -2253.89,-1714.21 ; -2267.17,-1711.55 -2253.89,-1711.55 ; -2267.17,-1708.9 -2253.89,-1708.9 ; -2267.17,-1605.35 -2235.31,-1605.35 ; -2267.17,-1334.54 -2240.62,-1334.54 ; -2267.17,-1265.51 -2142.38,-1265.51 ; -2267.17,-1262.85 -2139.73,-1262.85 ; -2267.17,-1207.1 -1839.71,-1207.1 ; -2264.51,-2263.8 -2142.38,-2263.8 ; -2264.51,-2216.01 -2245.93,-2216.01 ; -2264.51,-2062.01 -2235.31,-2062.01 ; -2264.51,-2059.36 -2235.31,-2059.36 ; -2264.51,-1971.74 -2251.24,-1971.74 ; -2264.51,-1969.09 -2251.24,-1969.09 ; -2264.51,-1966.43 -2251.24,-1966.43 ; -2264.51,-1963.78 -2251.24,-1963.78 ; -2264.51,-1900.06 -2243.27,-1900.06 ; -2264.51,-1897.4 -2245.93,-1897.4 ; -2264.51,-1772.62 -2245.93,-1772.62 ; -2264.51,-1769.96 -2243.27,-1769.96 ; -2264.51,-1706.24 -2251.24,-1706.24 ; -2264.51,-1703.59 -2251.24,-1703.59 ; -2264.51,-1700.93 -2251.24,-1700.93 ; -2264.51,-1698.28 -2251.24,-1698.28 ; -2264.51,-1610.66 -2235.31,-1610.66 ; -2264.51,-1608 -2235.31,-1608 ; -2264.51,-1454.01 -2245.93,-1454.01 ; -2264.51,-1337.19 -2216.72,-1337.19 ; -2264.51,-1260.2 -2134.42,-1260.2 ; -2264.51,-1257.54 -2129.11,-1257.54 ; -2264.51,-1209.75 -2243.27,-1209.75 ; -2261.86,-2261.14 -2145.04,-2261.14 ; -2261.86,-2250.52 -2145.04,-2250.52 ; -2261.86,-2239.9 -2153,-2239.9 ; -2261.86,-2213.35 -2243.27,-2213.35 ; -2261.86,-2056.7 -2235.31,-2056.7 ; -2261.86,-1985.02 -2245.93,-1985.02 ; -2261.86,-1982.36 -2248.58,-1982.36 ; -2261.86,-1979.71 -2248.58,-1979.71 ; -2261.86,-1977.05 -2248.58,-1977.05 ; -2261.86,-1974.4 -2248.58,-1974.4 ; -2261.86,-1894.75 -2248.58,-1894.75 ; -2261.86,-1892.09 -2245.93,-1892.09 ; -2261.86,-1777.93 -2245.93,-1777.93 ; -2261.86,-1775.27 -2248.58,-1775.27 ; -2261.86,-1695.62 -2248.58,-1695.62 ; -2261.86,-1692.97 -2248.58,-1692.97 ; -2261.86,-1690.31 -2248.58,-1690.31 ; -2261.86,-1687.66 -2248.58,-1687.66 ; -2261.86,-1685 -2245.93,-1685 ; -2261.86,-1613.31 -2235.31,-1613.31 ; -2261.86,-1456.67 -2243.27,-1456.67 ; -2261.86,-1254.89 -2028.21,-1254.89 ; -2261.86,-1212.41 -2253.89,-1212.41 ; -2259.2,-2258.49 -2145.04,-2258.49 ; -2259.2,-2255.83 -2145.04,-2255.83 ; -2259.2,-2253.18 -2145.04,-2253.18 ; -2259.2,-2237.25 -2153,-2237.25 ; -2259.2,-2210.7 -2243.27,-2210.7 ; -2259.2,-2054.05 -2237.96,-2054.05 ; -2259.2,-2051.39 -2237.96,-2051.39 ; -2259.2,-2048.74 -2237.96,-2048.74 ; -2259.2,-1995.64 -2243.27,-1995.64 ; -2259.2,-1992.98 -2245.93,-1992.98 ; -2259.2,-1990.33 -2245.93,-1990.33 ; -2259.2,-1987.67 -2245.93,-1987.67 ; -2259.2,-1889.44 -2243.27,-1889.44 ; -2259.2,-1886.78 -2243.27,-1886.78 ; -2259.2,-1783.24 -2243.27,-1783.24 ; -2259.2,-1780.58 -2245.93,-1780.58 ; -2259.2,-1682.35 -2245.93,-1682.35 ; -2259.2,-1679.69 -2245.93,-1679.69 ; -2259.2,-1677.04 -2245.93,-1677.04 ; -2259.2,-1674.38 -2243.27,-1674.38 ; -2259.2,-1621.28 -2237.96,-1621.28 ; -2259.2,-1618.62 -2237.96,-1618.62 ; -2259.2,-1615.97 -2237.96,-1615.97 ; -2259.2,-1459.32 -2243.27,-1459.32 ; -2259.2,-1339.85 -2168.93,-1339.85 ; -2259.2,-1252.23 -2022.9,-1252.23 ; -2256.55,-2208.04 -2240.62,-2208.04 ; -2256.55,-2046.08 -2237.96,-2046.08 ; -2256.55,-2043.43 -2237.96,-2043.43 ; -2256.55,-2040.77 -2237.96,-2040.77 ; -2256.55,-2038.12 -2240.62,-2038.12 ; -2256.55,-2011.57 -2235.31,-2011.57 ; -2256.55,-2008.91 -2230,-2008.91 ; -2256.55,-2006.26 -2211.41,-2006.26 ; -2256.55,-2003.6 -2214.07,-2003.6 ; -2256.55,-2000.95 -2216.72,-2000.95 ; -2256.55,-1998.29 -2222.03,-1998.29 ; -2256.55,-1884.13 -2240.62,-1884.13 ; -2256.55,-1785.89 -2240.62,-1785.89 ; -2256.55,-1671.73 -2222.03,-1671.73 ; -2256.55,-1669.07 -2216.72,-1669.07 ; -2256.55,-1666.42 -2214.07,-1666.42 ; -2256.55,-1663.76 -2222.03,-1663.76 ; -2256.55,-1661.11 -2230,-1661.11 ; -2256.55,-1658.45 -2235.31,-1658.45 ; -2256.55,-1631.9 -2240.62,-1631.9 ; -2256.55,-1629.24 -2237.96,-1629.24 ; -2256.55,-1626.59 -2237.96,-1626.59 ; -2256.55,-1623.93 -2237.96,-1623.93 ; -2256.55,-1461.98 -2240.62,-1461.98 ; -2256.55,-1342.5 -2174.24,-1342.5 ; -2256.55,-1249.58 -2020.25,-1249.58 ; -2256.55,-1223.03 -2208.76,-1223.03 ; -2253.89,-2234.59 -2153,-2234.59 ; -2253.89,-2205.39 -2237.96,-2205.39 ; -2253.89,-2202.73 -2237.96,-2202.73 ; -2253.89,-2035.46 -2240.62,-2035.46 ; -2253.89,-2032.81 -2240.62,-2032.81 ; -2253.89,-2030.15 -2240.62,-2030.15 ; -2253.89,-2027.5 -2240.62,-2027.5 ; -2253.89,-2024.84 -2240.62,-2024.84 ; -2253.89,-2022.19 -2240.62,-2022.19 ; -2253.89,-2019.53 -2240.62,-2019.53 ; -2253.89,-2016.88 -2240.62,-2016.88 ; -2253.89,-2014.22 -2240.62,-2014.22 ; -2253.89,-1881.47 -2237.96,-1881.47 ; -2253.89,-1878.82 -2235.31,-1878.82 ; -2253.89,-1791.2 -2235.31,-1791.2 ; -2253.89,-1788.55 -2237.96,-1788.55 ; -2253.89,-1655.8 -2240.62,-1655.8 ; -2253.89,-1653.14 -2240.62,-1653.14 ; -2253.89,-1650.49 -2240.62,-1650.49 ; -2253.89,-1647.83 -2240.62,-1647.83 ; -2253.89,-1645.18 -2240.62,-1645.18 ; -2253.89,-1642.52 -2240.62,-1642.52 ; -2253.89,-1639.86 -2240.62,-1639.86 ; -2253.89,-1637.21 -2240.62,-1637.21 ; -2253.89,-1634.55 -2240.62,-1634.55 ; -2253.89,-1467.29 -2237.96,-1467.29 ; -2253.89,-1464.63 -2237.96,-1464.63 ; -2253.89,-1246.92 -2017.59,-1246.92 ; -2251.24,-2200.08 -2235.31,-2200.08 ; -2251.24,-1876.16 -2232.65,-1876.16 ; -2251.24,-1793.86 -2232.65,-1793.86 ; -2251.24,-1759.34 -2222.03,-1759.34 ; -2251.24,-1469.94 -2237.96,-1469.94 ; -2251.24,-1244.27 -2195.48,-1244.27 ; -2248.58,-2231.94 -2155.66,-2231.94 ; -2248.58,-2197.42 -2235.31,-2197.42 ; -2248.58,-2194.77 -2235.31,-2194.77 ; -2248.58,-2192.11 -2232.65,-2192.11 ; -2248.58,-2080.6 -2235.31,-2080.6 ; -2248.58,-2077.94 -2235.31,-2077.94 ; -2248.58,-2075.29 -2235.31,-2075.29 ; -2248.58,-2072.63 -2235.31,-2072.63 ; -2248.58,-2069.98 -2235.31,-2069.98 ; -2248.58,-2067.32 -2235.31,-2067.32 ; -2248.58,-1873.51 -2230,-1873.51 ; -2248.58,-1796.51 -2230,-1796.51 ; -2248.58,-1602.69 -2235.31,-1602.69 ; -2248.58,-1600.04 -2235.31,-1600.04 ; -2248.58,-1597.38 -2235.31,-1597.38 ; -2248.58,-1594.73 -2235.31,-1594.73 ; -2248.58,-1592.07 -2235.31,-1592.07 ; -2248.58,-1589.42 -2235.31,-1589.42 ; -2248.58,-1477.91 -2232.65,-1477.91 ; -2248.58,-1475.25 -2235.31,-1475.25 ; -2248.58,-1472.6 -2235.31,-1472.6 ; -2248.58,-1345.16 -2171.59,-1345.16 ; -2248.58,-1220.37 -2216.72,-1220.37 ; -2245.93,-2189.46 -2232.65,-2189.46 ; -2245.93,-2186.8 -2232.65,-2186.8 ; -2245.93,-2184.15 -2232.65,-2184.15 ; -2245.93,-2115.11 -2230,-2115.11 ; -2245.93,-2112.46 -2230,-2112.46 ; -2245.93,-2109.8 -2232.65,-2109.8 ; -2245.93,-2107.15 -2232.65,-2107.15 ; -2245.93,-2104.49 -2232.65,-2104.49 ; -2245.93,-2101.84 -2232.65,-2101.84 ; -2245.93,-2099.18 -2232.65,-2099.18 ; -2245.93,-2096.53 -2232.65,-2096.53 ; -2245.93,-2093.87 -2232.65,-2093.87 ; -2245.93,-2091.22 -2232.65,-2091.22 ; -2245.93,-2088.56 -2232.65,-2088.56 ; -2245.93,-2085.91 -2232.65,-2085.91 ; -2245.93,-2083.25 -2235.31,-2083.25 ; -2245.93,-1870.85 -2224.69,-1870.85 ; -2245.93,-1799.17 -2224.69,-1799.17 ; -2245.93,-1586.76 -2235.31,-1586.76 ; -2245.93,-1584.11 -2232.65,-1584.11 ; -2245.93,-1581.45 -2232.65,-1581.45 ; -2245.93,-1578.8 -2232.65,-1578.8 ; -2245.93,-1576.14 -2232.65,-1576.14 ; -2245.93,-1573.49 -2232.65,-1573.49 ; -2245.93,-1570.83 -2232.65,-1570.83 ; -2245.93,-1568.18 -2232.65,-1568.18 ; -2245.93,-1565.52 -2232.65,-1565.52 ; -2245.93,-1562.87 -2232.65,-1562.87 ; -2245.93,-1560.21 -2232.65,-1560.21 ; -2245.93,-1557.56 -2230,-1557.56 ; -2245.93,-1554.9 -2230,-1554.9 ; -2245.93,-1485.87 -2232.65,-1485.87 ; -2245.93,-1483.22 -2232.65,-1483.22 ; -2245.93,-1480.56 -2232.65,-1480.56 ; -2245.93,-1241.61 -2200.79,-1241.61 ; -2243.27,-2181.49 -2230,-2181.49 ; -2243.27,-2178.84 -2230,-2178.84 ; -2243.27,-2176.18 -2230,-2176.18 ; -2243.27,-2173.53 -2230,-2173.53 ; -2243.27,-2170.87 -2230,-2170.87 ; -2243.27,-2168.22 -2230,-2168.22 ; -2243.27,-2165.56 -2230,-2165.56 ; -2243.27,-2162.91 -2230,-2162.91 ; -2243.27,-2160.25 -2230,-2160.25 ; -2243.27,-2157.6 -2230,-2157.6 ; -2243.27,-2154.94 -2230,-2154.94 ; -2243.27,-2152.28 -2230,-2152.28 ; -2243.27,-2149.63 -2230,-2149.63 ; -2243.27,-2146.97 -2230,-2146.97 ; -2243.27,-2144.32 -2230,-2144.32 ; -2243.27,-2141.66 -2230,-2141.66 ; -2243.27,-2139.01 -2230,-2139.01 ; -2243.27,-2136.35 -2222.03,-2136.35 ; -2243.27,-2133.7 -2222.03,-2133.7 ; -2243.27,-2131.04 -2224.69,-2131.04 ; -2243.27,-2128.39 -2224.69,-2128.39 ; -2243.27,-2125.73 -2227.34,-2125.73 ; -2243.27,-2123.08 -2230,-2123.08 ; -2243.27,-2120.42 -2230,-2120.42 ; -2243.27,-2117.77 -2230,-2117.77 ; -2243.27,-1913.33 -2227.34,-1913.33 ; -2243.27,-1868.2 -2219.38,-1868.2 ; -2243.27,-1801.82 -2219.38,-1801.82 ; -2243.27,-1756.69 -2227.34,-1756.69 ; -2243.27,-1552.25 -2230,-1552.25 ; -2243.27,-1549.59 -2230,-1549.59 ; -2243.27,-1546.94 -2230,-1546.94 ; -2243.27,-1544.28 -2227.34,-1544.28 ; -2243.27,-1541.63 -2224.69,-1541.63 ; -2243.27,-1538.97 -2224.69,-1538.97 ; -2243.27,-1536.32 -2222.03,-1536.32 ; -2243.27,-1533.66 -2222.03,-1533.66 ; -2243.27,-1531.01 -2230,-1531.01 ; -2243.27,-1528.35 -2230,-1528.35 ; -2243.27,-1525.7 -2230,-1525.7 ; -2243.27,-1523.04 -2230,-1523.04 ; -2243.27,-1520.39 -2230,-1520.39 ; -2243.27,-1517.73 -2230,-1517.73 ; -2243.27,-1515.08 -2230,-1515.08 ; -2243.27,-1512.42 -2230,-1512.42 ; -2243.27,-1509.77 -2230,-1509.77 ; -2243.27,-1507.11 -2230,-1507.11 ; -2243.27,-1504.46 -2230,-1504.46 ; -2243.27,-1501.8 -2230,-1501.8 ; -2243.27,-1499.15 -2230,-1499.15 ; -2243.27,-1496.49 -2230,-1496.49 ; -2243.27,-1493.84 -2230,-1493.84 ; -2243.27,-1491.18 -2230,-1491.18 ; -2243.27,-1488.53 -2230,-1488.53 ; -2243.27,-1347.81 -2171.59,-1347.81 ; -2240.62,-1865.54 -2211.41,-1865.54 ; -2240.62,-1804.48 -2214.07,-1804.48 ; -2237.96,-1862.89 -2155.66,-1862.89 ; -2237.96,-1807.13 -2155.66,-1807.13 ; -2237.96,-1238.96 -2208.76,-1238.96 ; -2232.65,-1860.23 -2160.97,-1860.23 ; -2232.65,-1809.79 -2160.97,-1809.79 ; -2232.65,-1350.47 -2200.79,-1350.47 ; -2232.65,-1334.54 -2216.72,-1334.54 ; -2230,-1331.88 -2216.72,-1331.88 ; -2230,-1329.23 -2216.72,-1329.23 ; -2227.34,-2139.01 -2219.38,-2139.01 ; -2227.34,-1857.58 -2163.62,-1857.58 ; -2227.34,-1812.44 -2163.62,-1812.44 ; -2227.34,-1531.01 -2219.38,-1531.01 ; -2227.34,-1326.57 -2216.72,-1326.57 ; -2227.34,-1323.92 -2216.72,-1323.92 ; -2224.69,-1321.26 -2216.72,-1321.26 ; -2224.69,-1318.61 -2219.38,-1318.61 ; -2224.69,-1315.95 -2219.38,-1315.95 ; -2224.69,-1313.3 -2219.38,-1313.3 ; -2224.69,-1310.64 -2222.03,-1310.64 ; -2222.03,-2141.66 -2216.72,-2141.66 ; -2222.03,-1854.92 -2168.93,-1854.92 ; -2222.03,-1815.1 -2168.93,-1815.1 ; -2222.03,-1528.35 -2216.72,-1528.35 ; -2222.03,-1209.75 -1842.36,-1209.75 ; -2219.38,-2144.32 -2214.07,-2144.32 ; -2219.38,-1663.76 -2211.41,-1663.76 ; -2219.38,-1525.7 -2214.07,-1525.7 ; -2214.07,-2146.97 -2211.41,-2146.97 ; -2214.07,-1852.27 -2179.55,-1852.27 ; -2214.07,-1817.75 -2176.9,-1817.75 ; -2214.07,-1523.04 -2211.41,-1523.04 ; -2214.07,-1228.34 -2200.79,-1228.34 ; -2211.41,-2008.91 -2208.76,-2008.91 ; -2211.41,-1212.41 -2017.59,-1212.41 ; -2206.1,-1215.06 -2022.9,-1215.06 ; -2203.45,-1230.99 -2198.14,-1230.99 ; -2200.79,-1337.19 -2166.28,-1337.19 ; -2200.79,-1217.72 -2022.9,-1217.72 ; -2195.48,-1220.37 -2022.9,-1220.37 ; -2192.83,-2125.73 -2166.28,-2125.73 ; -2192.83,-2123.08 -2163.62,-2123.08 ; -2192.83,-2120.42 -2160.97,-2120.42 ; -2192.83,-2117.77 -2160.97,-2117.77 ; -2192.83,-2115.11 -2158.31,-2115.11 ; -2192.83,-2112.46 -2155.66,-2112.46 ; -2192.83,-2109.8 -2153,-2109.8 ; -2192.83,-2107.15 -2150.35,-2107.15 ; -2192.83,-2104.49 -2147.69,-2104.49 ; -2192.83,-2101.84 -2145.04,-2101.84 ; -2192.83,-2099.18 -2139.73,-2099.18 ; -2192.83,-2096.53 -2137.07,-2096.53 ; -2192.83,-2093.87 -2134.42,-2093.87 ; -2192.83,-2091.22 -2129.11,-2091.22 ; -2192.83,-2088.56 -2126.45,-2088.56 ; -2192.83,-2085.91 -2121.14,-2085.91 ; -2192.83,-2083.25 -2118.49,-2083.25 ; -2192.83,-2080.6 -2113.18,-2080.6 ; -2192.83,-2077.94 -2107.87,-2077.94 ; -2192.83,-2075.29 -2102.56,-2075.29 ; -2192.83,-2072.63 -2097.24,-2072.63 ; -2192.83,-2069.98 -2089.28,-2069.98 ; -2192.83,-2067.32 -2081.31,-2067.32 ; -2192.83,-2064.67 -2073.35,-2064.67 ; -2192.83,-2062.01 -2065.38,-2062.01 ; -2192.83,-2059.36 -2057.42,-2059.36 ; -2192.83,-2056.7 -2052.11,-2056.7 ; -2192.83,-2054.05 -2046.8,-2054.05 ; -2192.83,-2051.39 -2041.49,-2051.39 ; -2192.83,-2048.74 -2036.18,-2048.74 ; -2192.83,-2046.08 -2033.52,-2046.08 ; -2192.83,-2043.43 -2030.87,-2043.43 ; -2192.83,-2040.77 -2028.21,-2040.77 ; -2192.83,-2038.12 -2025.56,-2038.12 ; -2192.83,-2035.46 -2022.9,-2035.46 ; -2192.83,-2032.81 -2022.9,-2032.81 ; -2192.83,-2030.15 -2020.25,-2030.15 ; -2192.83,-2027.5 -2020.25,-2027.5 ; -2192.83,-2024.84 -2017.59,-2024.84 ; -2192.83,-2022.19 -2017.59,-2022.19 ; -2192.83,-2019.53 -2017.59,-2019.53 ; -2192.83,-2016.88 -2017.59,-2016.88 ; -2192.83,-2014.22 -2017.59,-2014.22 ; -2192.83,-2011.57 -2020.25,-2011.57 ; -2192.83,-2008.91 -2020.25,-2008.91 ; -2192.83,-2006.26 -2022.9,-2006.26 ; -2192.83,-2003.6 -2025.56,-2003.6 ; -2192.83,-2000.95 -2030.87,-2000.95 ; -2192.83,-1998.29 -2036.18,-1998.29 ; -2192.83,-1995.64 -2041.49,-1995.64 ; -2192.83,-1992.98 -2046.8,-1992.98 ; -2192.83,-1990.33 -2052.11,-1990.33 ; -2192.83,-1987.67 -2057.42,-1987.67 ; -2192.83,-1985.02 -2062.73,-1985.02 ; -2192.83,-1982.36 -2065.38,-1982.36 ; -2192.83,-1979.71 -2068.04,-1979.71 ; -2192.83,-1977.05 -2070.69,-1977.05 ; -2192.83,-1974.4 -2073.35,-1974.4 ; -2192.83,-1971.74 -2073.35,-1971.74 ; -2192.83,-1969.09 -2171.59,-1969.09 ; -2192.83,-1966.43 -2174.24,-1966.43 ; -2192.83,-1963.78 -2171.59,-1963.78 ; -2192.83,-1961.12 -2171.59,-1961.12 ; -2192.83,-1958.47 -2168.93,-1958.47 ; -2192.83,-1955.81 -2168.93,-1955.81 ; -2192.83,-1953.16 -2166.28,-1953.16 ; -2192.83,-1950.5 -2163.62,-1950.5 ; -2192.83,-1947.85 -2160.97,-1947.85 ; -2192.83,-1945.19 -2160.97,-1945.19 ; -2192.83,-1942.54 -2158.31,-1942.54 ; -2192.83,-1939.88 -2158.31,-1939.88 ; -2192.83,-1937.23 -2155.66,-1937.23 ; -2192.83,-1934.57 -2155.66,-1934.57 ; -2192.83,-1931.92 -2155.66,-1931.92 ; -2192.83,-1929.26 -2153,-1929.26 ; -2192.83,-1926.61 -2153,-1926.61 ; -2192.83,-1923.95 -2153,-1923.95 ; -2192.83,-1921.3 -2153,-1921.3 ; -2192.83,-1918.64 -2153,-1918.64 ; -2192.83,-1915.99 -2153,-1915.99 ; -2192.83,-1913.33 -2153,-1913.33 ; -2192.83,-1910.68 -2153,-1910.68 ; -2192.83,-1908.02 -2153,-1908.02 ; -2192.83,-1905.37 -2153,-1905.37 ; -2192.83,-1902.71 -2155.66,-1902.71 ; -2192.83,-1900.06 -2155.66,-1900.06 ; -2192.83,-1897.4 -2155.66,-1897.4 ; -2192.83,-1894.75 -2158.31,-1894.75 ; -2192.83,-1892.09 -2158.31,-1892.09 ; -2192.83,-1889.44 -2160.97,-1889.44 ; -2192.83,-1886.78 -2163.62,-1886.78 ; -2192.83,-1884.13 -2166.28,-1884.13 ; -2192.83,-1881.47 -2168.93,-1881.47